# Altium PCB FPGA_Board.PcbDoc (part 4 of 10)
Units mm, origin at the board's own origin, x right, y up, seen from the top; angles counter-clockwise.
Board outline 103.63 x 86.08 mm, 2 copper layers (Top Layer, Bottom Layer); 109 components, 200 nets, 667 pads, 237 vias.
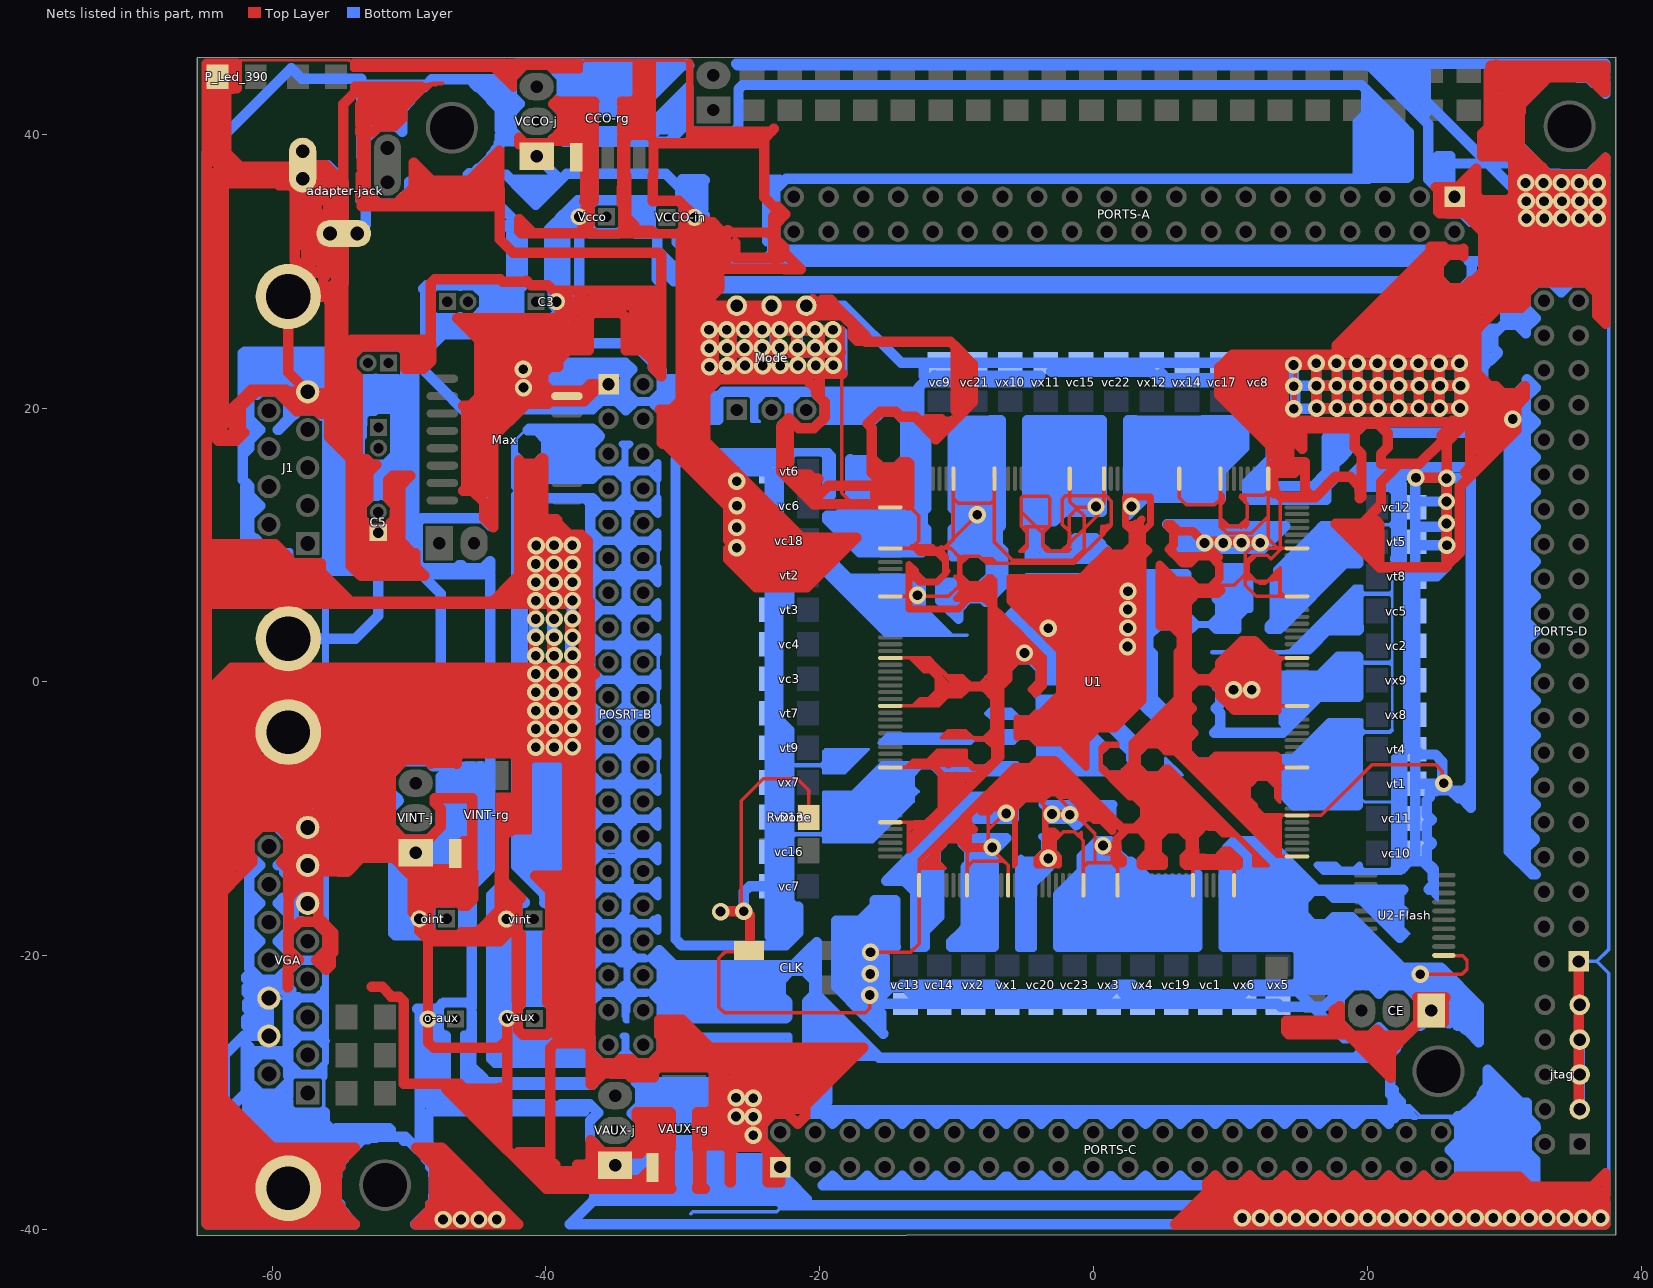
[diagram p4: the nets of this part, all layers, seen from the top]

## Via types
v1: diameter 1.27, hole 0.711, Top Layer to Bottom Layer, 237 vias

## Nets (pads, with @x,y where several pads share a name; then routed paths per layer and width w, separated by ;. In a path a pad name is that pad's centre, name@x,y a point inside that pad or via, vN(x,y) a via of type N, cw(c..) or ccw(c..) an arc to the next point about the centre after c; other vN are vias at no path point) (continued)
GND: (continued)
  Top Layer w0.762: P_Led_390.2@-64.771,45.051 -64.771,9.89 ; -64.771,45.139 -63.061,45.139 ; -62.584,45.079 -62.584,43.35 -62.862,43.35 -62.883,43.329 -62.967,43.413 -62.967,45.055 -62.883,45.139 ; -62.584,45.139 -62.883,45.139 ; VGA.16@-59.052,-36.985 VGA.16@-58.822,-36.985 -60.556,-38.72 ; J1.10@-58.822,3.155 J1.10@-58.822,1.03 ; adapter-jack.2A@-57.775,36.75 -58.463,37.438 -59.794,37.438 ; adapter-jack.2@-57.775,37.75 -56.079,37.75 -54.817,36.488 ; VGA.6@-57.402,-16.17 VGA.7@-57.402,-13.4 ; -55.226,-38.192 -55.257,-38.223 ; -55.226,-35.428 -55.226,-35.279 ; -55.022,-38.279 -55.022,-38.458 ; -55.022,-35.447 -55.293,-35.718 ; -54.755,-38.725 -55.022,-38.458 ; -54.727,19.712 -54.727,18.203 -54.712,18.218 -54.712,19.698 -54.726,19.713 ; -54.324,-34.366 -55.226,-35.268 ; -53.159,36.334 -53.159,35.844 -52.231,34.916 ; -52.72,-22.279 -51.972,-22.279 -51.303,-22.948 -51.303,-22.991 -50.721,-22.991 -50.379,-23.333 -50.379,-29.339 -46.343,-29.339 -45.959,-29.723 ; -52.656,40.159 -52.231,40.584 -51.071,40.584 -50.494,41.161 ; C5.1@-52.25,10.9 C5.1@-52.46,10.9 ; -51.101,41.076 -52.848,41.076 ; -51.041,12.445 -51.041,11.899 ; -50.898,-11.034 -50.418,-11.514 -48.606,-11.514 -47.678,-10.586 -47.678,-9.274 -48.116,-8.836 -48.116,-8.484 -45.376,-8.484 -45.376,-11.635 ; -49.179,43.247 -50.494,41.932 -50.494,41.161 ; -49.09,43.489 -53.941,43.489 -53.941,43.058 -54.817,42.182 -54.817,36.488 ; -48.426,-5.985 -48.34,-5.899 -46.608,-5.899 ; -46.516,-5.991 -46.608,-5.899 ; -46.374,-5.405 -46.516,-5.548 -46.516,-5.899 ; v1(-46.204,-39.267) v1(-47.514,-39.267) -49.157,-39.267 -49.504,-39.614 -42.011,-39.614 -47.592,-34.032 -49.477,-34.032 -48.174,-35.335 -48.174,-37.913 ; v1(-44.893,-39.267) v1(-43.597,-39.267) ; -44.245,-39.238 -49.128,-39.238 -48.552,-38.662 ; -43.386,35.971 -43.386,34.753 ; vaux.2@-42.833,-24.575 -42.833,-26.125 ; -42.539,-9.696 -42.704,-9.861 ; -42.402,-10.753 -42.405,-10.756 ; -41.963,12.193 -41.963,16.193 -41.7,15.931 -40.69,15.931 -40.27,16.351 -40.205,16.286 -40.205,11.942 -40.142,11.879 ; -41.853,-23.519 -41.853,-23.398 ; -41.853,-15.812 -43.066,-14.599 ; -41.225,12.335 -41.424,12.534 -41.424,15.412 -40.783,15.412 -40.712,15.341 -40.783,15.27 -40.783,11.879 ; v1@-40.898,4.508 -40.844,4.562 v1@-40.844,5.692 ; v1@-40.889,3.202 -40.889,1.869 v1@-40.853,1.833 ; v1@-40.862,7.164 -40.859,7.167 v1@-40.859,7.512 ; v1@-40.859,8.609 v1@-40.859,7.512 ; v1@-40.844,5.841 v1@-40.844,5.692 ; v1@-40.827,-4.777 v1@-40.827,-4.305 ; v1@-40.8,-3.427 -40.827,-3.454 v1@-40.827,-3.659 ; v1(-40.712,9.956) v1@-40.252,9.956 ; -40.026,-5.507 -41.042,-5.507 -41.124,-5.589 -41.408,-5.873 -41.612,-5.873 ; -39.941,-5.507 -39.09,-5.507 ; -39.76,25.374 -44.205,25.374 -44.367,25.212 -45.275,26.12 -45.225,26.07 -39.235,26.07 -38.765,26.07 ; v1@-39.544,3.221 -39.528,3.205 v1@-39.528,1.874 ; v1@-39.544,4.552 v1@-39.544,5.692 ; v1@-39.512,7.167 v1@-39.512,7.464 ; v1@-39.496,5.836 -39.544,5.788 v1@-39.544,5.692 ; v1@-39.417,-3.433 -39.407,-3.423 v1@-39.407,-3.042 ; v1(-39.408,9.976) -39.428,9.956 v1@-40.236,9.956 ; v1@-38.223,3.195 -38.215,3.203 v1@-38.215,4.537 ; v1@-38.199,1.878 v1@-38.199,1.03 ; v1@-38.199,8.603 -38.205,8.609 v1@-38.483,8.609 ; v1@-38.174,0.544 -38.199,0.569 v1@-38.199,1.03 ; v1@-38.158,-0.773 v1@-38.158,-1.105 ; v1@-38.15,7.163 v1@-38.15,6.946 ; v1@-38.134,5.846 -38.15,5.862 v1@-38.15,6.273 ; v1@-38.109,-2.082 -38.158,-2.033 v1@-38.158,-1.105 ; v1@-38.081,-3.409 v1@-38.081,-3.426 ; v1(-38.063,-4.724) -38.081,-4.706 v1@-38.081,-4.282 ; -37.732,-35.278 -37.071,-35.278 -36.584,-34.791 ; Vcco.2@-37.575,33.975 -37.575,34.051 -36.86,34.767 ; -36.729,-29.383 -36.729,-27.816 ; -36.455,32.779 -37.135,32.779 ; -36.441,0.556 -36.763,0.877 ; -36.382,21.75 -36.766,21.75 -37.255,21.261 -39.687,21.261 ; -29.192,24.065 -29.16,24.033 -29.16,22.575 ; v1@-28.041,23.029 v1@-28.431,23.029 ; v1@-27.924,25.697 -27.902,25.675 v1@-27.737,25.675 ; v1(-27.245,-16.776) -27.164,-16.857 -27.056,-16.749 v1(-25.546,-16.749) ; v1@-26.811,24.394 -27.595,24.394 v1@-27.737,24.252 ; v1@-26.784,23.09 -27.203,23.09 v1@-27.737,22.556 ; -26.171,32.083 -26.171,30.975 -23.412,30.975 ; v1@-26.167,-30.38 v1@-26.167,-30.479 ; v1(-26.113,-31.743) -26.167,-31.689 v1@-26.167,-31.433 ; -26.086,22.1 -26.475,22.489 -26.475,22.5 ; v1(-26.075,14.65) -26.075,12.9 v1(-26.05,12.875) -26.05,11.3 v1(-26.075,11.275) v1(-26.075,9.8) -26.601,10.326 -26.701,10.326 -26.701,12.787 -31.295,17.381 -31.456,17.381 -31.555,17.48 -31.555,19.763 -31.681,19.889 -30.857,19.889 -30.166,20.58 -30.166,32.154 -30.096,32.224 -30.04,32.168 -29.596,32.168 -29.596,20.817 -29.818,20.595 -29.818,20.512 -30.984,19.346 -30.984,17.875 -31.067,17.792 -26.682,13.407 -26.627,13.407 -26.627,15.017 -26.932,15.322 -27.098,15.156 -27.098,14.489 -28.32,15.711 -28.32,16.405 -27.57,15.655 -27.293,15.655 -28.597,16.959 -28.653,16.959 -28.902,16.71 -28.902,16.21 -30.429,17.737 -30.429,18.736 -30.651,18.958 -29.152,20.457 -29.152,20.512 -28.986,20.512 -28.958,20.484 -29.097,20.345 -29.097,18.319 ; v1@-25.501,24.394 -26.168,24.394 v1@-26.475,24.088 ; v1@-25.487,23.09 -25.885,23.09 -26.475,22.5 ; CLK.2@-25.175,-19.625 -25.1,-19.55 v1@-25.1,-17.055 ; v1(-24.858,-30.412) v1@-24.925,-30.479 ; v1(-24.858,-33.109) v1@-25.023,-33.109 ; v1@-24.816,-31.82 -24.89,-31.82 -24.934,-31.776 v1@-24.934,-31.337 ; -24.567,-31.163 -23.812,-31.163 ; v1@-24.197,23.097 -24.258,23.097 -24.855,22.5 ; -23.798,-34.624 -23.798,-35.407 ; -23.235,30.798 -23.412,30.975 ; v1@-22.893,23.09 -22.893,22.842 -23.235,22.5 ; PORTS-C.1@-22.882,-35.229 -23.798,-34.313 ; PORTS-C.1@-22.882,-35.07 -22.882,-34.782 -23.798,-33.866 ; v1@-21.603,23.097 -21.603,22.512 v1@-21.615,22.5 ; -20.985,26.395 -20.985,25.685 -20.975,25.675 ; Mode.4@-20.529,27.94 -20.529,27.886 -20.01,27.367 -19.979,27.398 -19.308,27.398 -19.827,27.917 -19.198,27.917 -19.085,27.804 -19.085,27.708 -17.051,25.674 ; v1@-20.286,23.123 -20.286,22.791 -19.995,22.5 ; v1(-19.052,24.422) -19.052,24.291 -18.946,24.185 -18.548,24.185 v1@-18.525,24.162 ; -18.525,22.65 v1@-18.525,24.088 ; -18.375,22.5 -19.995,22.5 ; -16.194,16.626 -16.194,18.545 -16.496,18.847 -15.599,19.744 -14.47,19.744 -14.077,19.351 -13.045,19.351 -11.536,17.842 -11.536,17.722 -11.136,18.121 ; -10.599,-5.955 -10.847,-5.707 -10.974,-5.58 -11.628,-5.58 -11.554,-5.506 -10.244,-5.506 -9.9,-5.506 -9.563,-5.506 ; -9.697,23.267 -9.368,22.938 -9.368,20.505 -10.071,19.802 -10.071,24.471 ; -4.642,-2.819 -4.884,-3.061 ; -3.746,-2.276 -4.53,-3.061 -4.884,-3.061 ; -2.364,-0.895 -2.364,-0.816 -1.812,-0.264 -1.812,0.749 ; -2.003,3.209 -2.003,2.694 -2.003,2.294 ; -1.882,2.815 -1.467,2.815 3.464,7.746 3.464,6.909 v1@3.103,6.548 ; v1(2.489,5.289) v1@2.489,5.05 ; v1(2.504,3.934) 2.489,3.949 v1@2.489,5.05 ; v1(2.51,6.629) v1@2.847,6.292 ; 8.158,-38.729 8.178,-38.709 ; 10.209,-39.193 v1@11.112,-39.193 ; 10.651,-7.741 10.119,-7.741 10.119,-7.91 11.025,-8.816 11.025,-8.499 ; v1(10.86,-39.158) v1@11.147,-39.158 ; v1@11.205,-39.1 v1@11.147,-39.158 ; 11.529,-39.193 v1@11.112,-39.193 ; 11.614,-9.088 11.35,-8.824 11.106,-8.58 ; 11.75,-10.218 8.923,-7.391 10.892,-7.391 11.025,-7.524 ; 12.83,-39.193 v1@12.865,-39.158 ; 13.183,13.764 13.183,14.154 13.131,14.206 13.131,15.863 13.533,15.461 13.533,15.268 14.66,15.268 15.436,16.044 ; 13.2,-10.955 12.958,-10.713 12.958,-10.556 12.363,-9.961 ; 13.206,-7.185 13.137,-7.115 12.916,-6.895 12.877,-6.856 11.821,-6.856 11.782,-6.895 11.567,-7.11 11.35,-7.327 11.153,-7.524 ; 13.313,-9.961 12.979,-9.961 12.363,-9.961 ; 13.625,13.584 13.725,13.484 15.957,13.484 15.967,13.494 ; 14.113,-39.15 12.873,-39.15 v1@12.865,-39.158 ; 14.262,-25.732 14.156,-25.625 ; 14.403,-25.732 17.829,-25.732 ; v1(14.6,23.15) v1@16.25,23.15 ; v1@15.044,-38.602 15.044,-37.768 14.818,-37.542 ; v1@15.408,-39.156 16.605,-39.156 v1@16.607,-39.158 ; v1(16.25,23.275) v1@16.25,23.15 ; v1(16.275,21.638) v1@17.746,21.638 ; v1@16.685,-39.236 v1@16.607,-39.158 ; 17.534,-23.986 17.534,-24.147 ; v1@17.955,-39.359 18.21,-39.359 v1@18.411,-39.158 ; v1@19.146,-39.022 18.547,-39.022 v1@18.411,-39.158 ; v1(19.243,23.275) v1@19.243,23.15 ; 19.51,18.609 19.77,18.869 20.78,18.869 21.494,18.155 21.494,17.145 20.986,16.637 20.986,15.924 22.318,15.924 ; 20.226,-25.834 18.914,-25.834 17.986,-24.906 ; v1@20.548,-39.03 20.579,-38.999 21.876,-38.999 v1@22.035,-39.158 ; v1(20.739,23.275) v1@20.739,23.15 ; v1(22.236,23.275) v1@22.236,23.15 ; v1@23.226,-38.969 v1@24.548,-38.969 ; v1(23.539,14.903) 25.738,14.903 v1(25.776,14.865) ; v1(23.732,23.275) v1@23.732,23.15 ; CE.1@24.65,-24 24.64,-24 CE.1@23.781,-24.858 ; v1(25.229,23.275) v1@25.229,23.15 ; v1@25.329,-39.349 22.226,-39.349 v1@22.035,-39.158 ; 25.517,35.496 25.571,35.442 25.571,34.673 25.612,34.714 27.424,34.714 ; 25.678,8.383 21.113,8.383 20.867,8.63 ; 25.871,-38.943 25.897,-38.917 27.22,-38.917 ; v1(26.8,21.638) v1@26.725,21.638 ; 28.2,34.259 27.968,34.027 27.968,34.519 27.89,34.597 27.541,34.597 27.424,34.714 ; 28.397,35.013 28.382,34.998 ; 28.54,-38.895 28.596,-38.839 30.496,-38.839 34.424,-38.839 36.175,-38.839 36.418,-38.596 ; v1(30.609,19.197) 30.777,19.029 v1@30.864,19.029 ; 31.103,41.553 31.121,41.571 ; 31.103,42.704 30.667,43.14 30.667,43.558 30.894,43.331 31.748,43.331 31.748,43.505 32.794,44.551 ; v1(31.55,36.446) 31.55,36.409 31.579,36.38 v1@31.677,36.38 ; v1@31.596,35.095 v1@31.677,35.095 ; v1(31.615,33.855) v1@32.119,33.855 ; 31.877,-37.059 31.727,-37.209 31.27,-37.209 ; 32.764,37.585 32.702,37.646 32.606,37.646 ; v1@32.889,36.38 v1@31.825,36.38 ; v1@32.919,33.855 v1(32.909,33.855) v1@32.748,33.855 ; v1@32.919,35.091 32.915,35.095 v1@32.728,35.095 ; v1@34.183,36.405 34.21,36.432 v1@35.425,36.432 ; v1@34.216,35.095 v1@34.832,35.095 ; v1@34.232,33.855 34.271,33.816 v1@34.706,33.816 ; v1@34.565,-39.323 36.191,-39.323 v1@36.356,-39.158 ; 35.433,-24.4 35.433,-31.143 jtag.3@35.5,-31.21 ; jtag.9@35.433,-23.59 PORTS-D.1@35.433,-20.415 ; v1@35.506,35.099 35.502,35.095 v1@35.223,35.095 ; v1@35.6,33.816 v1@35.223,33.816 ; v1@35.849,-39.359 v1@36.841,-39.359 ; v1@36.784,36.432 v1@36.734,36.432 ; v1@36.789,33.798 36.809,33.818 v1(36.809,35.112) ; v1@37.089,-39.223 v1@37.042,-39.176 ; 37.234,29.31 37.218,29.294 ; 37.387,37.182 37.387,26.169 36.767,26.789 36.767,28.398 36.11,29.055 36.11,29.091 36.074,29.091 35.986,29.179 32.34,29.179 31.559,28.398 31.559,27.643 31.227,27.311 29.555,27.311 28.396,26.152 ; 37.387,37.318 37.387,38.279 36.154,37.047 33.206,37.047 32.606,37.646 ; -64.771,-0.783 -64.771,-39.572 -64.729,-39.614 -63.979,-39.614 ; -64.771,-0.783 -62.958,1.03 J1.10@-58.822,1.03 ; -64.771,-0.783 -64.771,5.692 ; -64.771,5.692 -54.317,5.692 ; -64.771,5.692 -64.771,6.155 ; -64.771,6.155 -62.374,6.155 -62.203,6.326 -55.511,6.326 -56.08,6.895 -56.08,6.99 -56.743,7.653 ; -64.771,6.155 -64.771,9.89 ; -64.771,9.89 -64.611,9.89 -64.435,10.066 -59.783,10.066 -58.831,9.114 -58.831,9.023 -58.489,8.681 -56.46,8.681 -56.46,8.039 -54.563,6.142 ; -64.276,-30.914 -61.753,-33.437 -61.554,-33.238 ; -64.276,-30.914 -64.276,-39.317 -63.979,-39.614 ; -64.276,-30.914 -64.276,-16.567 ; -64.276,-16.567 -63.755,-16.046 -63.755,-9.581 -63.484,-9.31 -64.172,-9.31 -64.276,-9.206 -64.276,-16.567 ; P_Led_390.2@-64,44.2 -63.061,45.139 ; P_Led_390.2@-64,44.2 -64,39.475 -64,39.284 -63.362,38.646 ; P_Led_390.2@-64,44.2 -63.362,43.562 -63.362,38.837 -63.362,38.646 ; -63.979,-39.614 -60.76,-39.614 ; -63.615,-15.373 -63.615,-30.384 -59.967,-34.032 -58.989,-34.032 ; -63.615,-15.373 -63.615,-15.343 -63.066,-14.794 ; -63.615,-15.373 -63.066,-14.823 -63.066,-14.794 ; -63.412,38.003 -62.809,37.399 -62.758,37.399 -62.517,37.158 -62.517,37.055 ; -63.412,38.003 -63.792,37.623 -64.361,38.192 -64.361,38.933 -63.948,38.52 -63.93,38.52 -63.412,38.003 ; -63.412,38.003 -63.362,38.053 -63.362,38.646 ; -63.362,38.646 -62.154,37.438 -59.794,37.438 ; -63.066,-14.794 -61.44,-13.168 -61.44,-12.838 -61.671,-12.607 -61.671,-11.423 ; -63.066,-14.794 -63.066,-8.843 ; -63.066,-8.843 -64.387,-8.843 -64.387,-1.288 -62.909,0.19 -62.472,0.19 -62.472,0.224 -62.64,0.392 -58.822,0.392 ; -63.066,-8.843 -63.066,-8.508 ; -63.066,-8.843 -58.032,-8.843 ; -63.066,-8.508 -63.066,-7.976 ; -63.066,-8.508 -63.513,-8.508 -63.883,-8.138 -63.883,-1.59 -62.545,-0.252 -62.545,-0.239 -58.822,-0.239 ; -63.066,-8.508 -58.367,-8.508 ; -63.066,-7.976 -63.066,-6.766 -62.691,-7.141 ; -63.066,-7.976 -63.086,-7.976 -63.296,-7.766 -63.296,-2.012 -62.128,-0.844 -58.822,-0.844 ; -63.066,-7.976 -58.899,-7.976 ; -63.061,45.139 -62.883,45.139 ; -62.691,-7.141 -62.649,-7.183 -59.125,-7.183 ; -62.691,-7.141 -62.691,-7.517 -62.566,-7.392 -59.125,-7.392 ; -62.691,-7.141 -62.691,-2.324 -61.899,-1.532 VGA.17@-58.822,-1.532 ; -62.517,37.055 -60.177,37.055 ; -62.517,37.055 -63.327,37.055 -63.447,37.175 -64.206,37.175 -64.103,37.072 -64.103,20.7 -64.189,20.614 -64.189,18.667 -63.602,18.667 -62.793,19.476 -62.793,19.58 -62.758,19.545 -62.758,18.288 -62.982,18.064 -64.378,18.064 -63.93,17.616 -62.62,17.616 -62.052,18.184 -62.276,18.408 -62.276,20.08 -61.122,21.234 -59.65,21.234 -58.813,20.397 -58.813,20.373 -58.192,19.752 -58.091,19.752 -57.994,19.849 -56.81,19.849 -56.558,19.597 -55.848,19.597 ; -62.441,-34.125 -62.191,-34.375 -62.086,-34.375 -62.086,-37.545 -62.419,-37.878 -62.712,-37.878 -62.712,-34.459 -63.046,-34.125 -62.441,-34.125 ; -62.441,-34.125 -63.275,-33.291 -63.275,-38.504 -61.752,-38.504 -61.669,-38.421 -61.836,-38.254 -61.836,-35.043 -61.252,-34.459 -61.252,-34.438 -61.565,-34.125 ; -62.441,-34.125 -61.565,-34.125 ; -61.94,-12.687 -62.671,-13.418 -62.795,-13.418 -62.441,-13.064 -62.441,-9.227 -61.503,-9.227 -61.44,-9.164 -61.44,-9.56 ; -61.94,-12.687 -61.836,-12.583 -61.836,-13.126 -61.94,-13.23 -61.94,-12.687 ; -61.94,-12.687 -61.94,-9.56 -61.44,-9.56 ; -61.671,-11.423 -61.671,-11.192 -61.44,-10.961 -61.44,-9.56 ; -61.671,-11.423 -60.834,-10.586 -59.518,-10.586 ; -61.565,-34.125 -63.504,-32.186 -63.713,-32.186 -63.755,-32.228 -63.755,-39.025 -63.713,-39.067 -61.336,-39.067 -60.939,-38.67 -60.939,-38.567 -61.398,-38.108 -61.398,-35.376 ; -61.565,-34.125 -60.668,-34.125 ; -61.554,-33.238 -63.817,-30.976 -63.588,-30.976 -61.336,-33.228 -61.544,-33.228 -61.554,-33.238 ; -61.554,-33.238 -60.668,-34.125 ; -61.44,-9.56 -58.104,-9.56 -57.895,-9.769 VGA.8@-57.895,-10.137 ; -61.398,-35.376 -61.398,-35.272 -61.315,-35.272 -60.564,-34.521 ; -61.398,-35.376 -61.544,-35.376 -60.689,-34.521 -60.564,-34.521 ; -61.398,-35.376 -60.606,-35.376 ; -60.76,-39.614 -56.648,-39.614 ; -60.76,-39.614 -60.76,-38.923 -60.556,-38.72 ; -60.668,-34.125 -60.418,-34.375 -60.564,-34.521 ; -60.668,-34.125 -59.271,-34.125 -58.875,-34.521 -60.564,-34.521 ; -60.606,-35.376 -60.189,-34.959 -60.085,-34.959 -60.502,-35.376 -60.606,-35.376 ; -60.606,-35.376 -61.127,-35.897 -61.127,-38.149 -60.556,-38.72 ; -60.556,-38.72 -60.105,-39.171 -56.581,-39.171 -56.394,-38.984 -56.499,-38.879 -56.79,-38.879 -56.79,-38.733 -55.831,-37.774 -55.768,-37.774 -55.768,-34.521 -56.122,-34.167 -58.291,-34.167 -56.706,-35.752 ; -60.177,37.055 -59.467,37.055 -59.157,36.745 -56.795,36.745 -56.399,37.141 -55.314,36.056 -55.314,29.23 -55.761,28.783 -56.279,28.783 -56.279,29.489 -55.9,29.868 -55.9,34.918 -56.261,35.279 -56.261,35.71 ; -60.177,37.055 -59.794,37.438 ; -59.834,8.184 -60.573,8.184 -60.801,7.956 -63.398,7.956 -63.266,7.824 -62.09,7.824 -61.938,7.672 -59.55,7.672 -59.834,7.956 -59.834,8.184 ; -59.834,8.184 -59.569,8.184 -58.962,7.577 -57.54,7.577 ; -59.834,8.184 -59.834,8.298 -60.289,8.753 -60.422,8.62 -63.834,8.62 -63.834,7.597 -63.549,7.312 -57.711,7.312 -57.54,7.483 -57.54,7.577 ; -59.518,-10.586 -58.813,-11.291 ; -59.518,-10.586 -59.584,-10.52 -60.835,-10.52 -60.919,-10.436 -60.919,-9.957 -58.916,-9.957 -58.77,-10.103 ; -59.518,-10.586 -59.171,-10.586 ; -59.171,-10.586 -58.333,-10.586 ; -59.171,-10.586 -58.813,-10.944 -58.813,-11.291 ; -59.171,-10.586 -59.292,-10.465 -59.292,-10.103 -58.77,-10.103 ; -59.125,-7.392 -54.747,-7.392 -51.16,-3.805 ; -59.125,-7.392 -59.125,-7.75 -58.899,-7.976 ; -59.125,-7.392 -59.125,-7.183 ; -59.125,-7.183 -59.125,-6.933 ; -59.125,-7.183 -56.289,-7.183 -55.465,-6.359 ; -59.125,-6.933 -56.102,-6.933 -55.497,-6.328 ; -59.125,-6.933 -59.125,-6.266 ; -59.125,-6.933 -61.753,-6.933 -62.149,-6.537 -62.066,-6.454 -62.066,-2.533 -61.774,-2.241 VGA.17@-58.822,-2.241 ; -59.125,-6.266 -56.415,-6.266 -55.987,-5.838 ; -59.125,-6.266 VGA.17@-59.125,-5.598 ; -59.125,-6.266 -61.524,-6.266 -61.503,-6.245 -61.503,-2.929 VGA.17@-58.822,-2.929 ; VGA.17@-59.125,-5.598 -56.498,-5.598 -56.362,-5.462 ; VGA.17@-59.125,-5.598 VGA.17@-59.125,-4.785 ; VGA.17@-59.125,-5.598 -61.106,-5.598 -61.148,-5.556 -61.148,-4.785 VGA.17@-59.125,-4.785 ; VGA.17@-59.125,-4.785 VGA.17@-56.811,-4.785 ; VGA.17@-59.125,-4.785 -59.125,-3.968 VGA.17@-58.822,-3.665 VGA.17@-58.822,-2.929 ; -58.989,-34.032 -56.977,-36.044 -56.977,-38.775 -56.706,-38.504 -56.706,-35.752 ; -58.989,-34.032 -55.226,-34.032 ; -58.899,-7.976 -54.454,-7.976 -50.783,-4.305 v1@-40.827,-4.305 ; -58.899,-7.976 -58.367,-8.508 ; -58.854,21.19 -58.071,20.407 -56.365,20.407 ; -58.854,21.19 -59.019,21.355 -61.517,21.355 -63.447,19.425 -63.689,19.425 -63.534,19.58 -63.534,36.624 -63.344,36.434 -59.639,36.434 -59.484,36.279 -58.674,36.279 -58.261,35.866 -58.364,35.763 -58.364,30.747 -58.192,30.575 -57.761,30.575 -57.519,30.817 -57.519,31.626 -57.623,31.73 -57.623,35.384 -57.881,35.642 -57.416,35.642 -56.899,35.125 -56.899,33.78 -56.916,33.763 -56.916,30.747 -57.261,30.402 -57.261,30.024 -57.105,29.868 -56.727,29.868 -56.33,30.265 -56.33,33.987 -56.744,34.401 -56.744,36.193 -56.261,35.71 ; -58.854,21.19 J1.5@-57.402,21.19 ; -58.831,-19.532 -58.831,-18.348 -58.792,-18.309 ; -58.831,-19.532 -58.057,-20.307 -58.813,-21.063 ; -58.831,-19.532 -58.831,-19.571 -58.813,-19.59 -58.813,-21.063 ; VGA.17@-58.822,-2.929 -54.454,-2.929 ; VGA.17@-58.822,-2.929 VGA.17@-58.822,-2.241 ; VGA.17@-58.822,-2.241 -52.682,-2.241 -52.64,-2.199 v1@-40.253,-2.199 ; VGA.17@-58.822,-2.241 VGA.17@-58.822,-1.532 ; VGA.17@-58.822,-1.532 -39.744,-1.532 ; VGA.17@-58.822,-1.532 -58.822,-0.844 ; -58.822,-0.844 v1@-39.744,-0.844 ; -58.822,-0.844 -58.822,-0.239 ; -58.822,-0.239 v1@-39.744,-0.239 ; -58.822,-0.239 -58.822,0.392 ; -58.822,0.392 v1@-39.649,0.392 ; -58.822,0.392 J1.10@-58.822,1.03 ; J1.10@-58.822,1.03 v1@-38.199,1.03 ; -58.813,-21.063 -58.869,-21.119 -58.869,-22.315 -58.831,-22.277 -58.831,-21.118 -58.813,-21.1 -58.813,-21.063 ; -58.813,-12.607 -58.813,-11.291 ; -58.813,-12.607 -58.813,-13.522 -58.792,-13.543 ; -58.813,-12.607 -59.323,-13.117 -59.323,-13.173 -58.813,-13.683 -58.813,-15.586 -58.792,-15.607 ; -58.792,-18.309 -57.994,-17.511 -56.81,-17.511 -55.973,-18.348 -55.973,-19.532 -56.766,-20.325 -56.06,-21.03 -55.722,-20.692 -55.722,-20.036 -56.021,-20.335 -56.121,-20.335 -55.522,-19.736 -55.522,-18.327 -56.648,-17.201 -56.648,-14.112 -56.363,-13.827 -55.166,-13.827 -55.138,-13.855 -54.497,-13.855 -53.486,-12.844 -51.135,-12.844 -50.01,-13.969 -49.768,-13.727 -49.768,-13.627 -49.726,-13.669 -49.726,-16.831 oint.2@-49.257,-17.3 ; -58.792,-18.309 -58.792,-15.607 ; -58.792,-15.607 -58.687,-15.712 -58.687,-15.628 -57.895,-14.836 VGA.8@-57.895,-10.586 ; -58.792,-15.607 -58.792,-14.377 ; -58.792,-14.377 -58.312,-14.857 -58.312,-14.023 -58.792,-13.543 ; -58.792,-14.377 -58.792,-13.543 ; -58.792,-13.543 -58.792,-13.168 -58.604,-13.356 -58.312,-13.356 -58.333,-13.335 -58.333,-10.586 ; -58.77,-10.103 -58.333,-10.54 -58.333,-10.586 ; -58.77,-10.103 -57.929,-10.103 VGA.8@-57.895,-10.137 ; -58.367,-8.508 -54.077,-8.508 -50.382,-4.813 -41.612,-4.813 ; -58.367,-8.508 -58.032,-8.843 ; -58.333,-10.586 VGA.8@-57.895,-10.586 ; -58.032,-8.843 -53.455,-8.843 -52.01,-7.397 ; -58.032,-8.843 -57.402,-9.473 VGA.8@-57.402,-10.63 ; VGA.8@-57.895,-10.586 VGA.8@-57.446,-10.586 ; VGA.8@-57.895,-10.586 VGA.8@-57.895,-10.137 ; VGA.8@-57.895,-10.137 VGA.8@-57.446,-10.586 ; -57.54,7.577 -57.54,7.653 -57.464,7.653 ; -57.54,7.577 -57.464,7.653 ; -57.464,7.653 -57.426,7.653 ; VGA.8@-57.446,-10.586 VGA.8@-57.402,-10.63 ; -57.426,7.653 -56.592,6.819 -56.933,6.819 -57.066,6.686 -64.099,6.686 -64.156,6.743 -64.156,7.027 -64.251,7.122 -64.251,9.188 -64.308,9.245 -64.156,9.397 -60.137,9.397 -60.023,9.283 -59.89,9.283 -59.246,8.639 -59.474,8.411 -59.72,8.411 -59.436,8.127 -56.952,8.127 -56.952,7.862 -56.743,7.653 ; -57.426,7.653 -56.743,7.653 ; VGA.7@-57.402,-13.4 VGA.8@-57.402,-10.63 ; VGA.7@-57.402,-13.4 -54.825,-13.4 -53.75,-12.325 -51.435,-12.325 ; J1.5@-57.402,21.19 -58.822,22.61 J1.11@-58.822,28.145 -55.688,28.145 -54.817,29.016 ; J1.5@-57.402,21.19 -57.309,21.097 -56.003,21.097 ; VGA.17@-56.811,-4.785 -56.582,-4.785 -55.289,-3.492 -56.289,-3.492 -56.811,-4.014 VGA.17@-56.811,-4.785 ; VGA.17@-56.811,-4.785 -56.811,-5.014 -56.362,-5.462 ; -56.743,7.653 -56.278,7.653 -54.767,6.142 ; -56.706,-35.752 -56.706,-35.104 -56.686,-35.084 -56.686,-35.042 -57.207,-34.521 -56.873,-34.521 -56.769,-34.417 -56.164,-35.022 -56.164,-37.377 -56.331,-37.544 -56.331,-35.918 -56.414,-35.835 -56.623,-35.835 -56.706,-35.752 ; -56.648,-39.614 -55.704,-38.67 ; -56.648,-39.614 -55.869,-39.614 ; -56.365,20.407 -56.003,20.407 -55.934,20.338 -55.969,20.338 -56.365,19.942 -56.365,20.407 ; -56.365,20.407 -56.365,20.735 -56.003,21.097 ; -56.362,-5.462 -55.987,-5.838 ; -56.362,-5.462 -54.58,-3.68 ; -56.261,35.71 -55.882,35.331 -55.813,35.4 -55.813,35.762 -56.261,36.21 -56.261,35.71 ; -56.003,21.097 -55.813,21.097 ; -56.003,21.097 -55.813,21.287 ; -55.987,-5.838 -53.829,-3.68 ; -55.987,-5.838 -55.497,-6.328 ; -55.869,-39.614 -54.759,-39.614 ; -55.869,-39.614 -55.314,-39.059 ; -55.848,19.597 -54.817,20.628 -54.817,29.016 ; -55.848,19.597 -55.848,17.9 -54.542,16.593 ; -55.813,21.097 -55.572,21.097 -55.365,21.304 ; -55.813,21.097 -55.813,20.666 -55.365,20.666 -55.365,21.304 ; -55.813,21.097 -55.813,21.287 ; -55.813,21.287 -55.538,21.562 -55.365,21.389 -55.365,21.304 ; -55.813,21.287 -55.813,27.697 -55.848,27.732 -55.762,27.818 -55.227,27.818 -55.227,21.442 -55.365,21.304 ; -55.704,-38.67 -55.293,-38.259 ; -55.704,-38.67 -55.314,-39.059 ; -55.594,-11.52 -55.679,-11.605 -55.394,-11.89 -55.294,-11.89 -55.594,-11.59 -55.594,-11.52 ; -55.594,-11.52 -55.508,-11.434 -53.814,-11.434 -53.557,-11.177 ; -55.594,-11.52 -55.594,-10.522 -53.756,-10.522 -53.543,-10.309 -53.543,-10.38 -54.098,-10.935 -55.038,-10.935 -54.796,-11.177 -53.557,-11.177 ; -55.497,-6.328 -52.849,-3.68 ; -55.497,-6.328 -55.465,-6.359 ; -55.465,-6.359 -55.247,-6.578 -55.247,-6.912 -52.14,-3.805 ; -55.465,-6.359 -52.911,-3.805 -52.14,-3.805 ; -55.314,-39.059 -55.293,-39.038 -55.293,-38.284 ; -55.314,-39.059 -54.759,-39.614 ; -55.293,-38.284 -55.293,-38.259 ; -55.293,-38.284 -55.022,-38.555 ; -55.293,-38.259 -55.293,-38.187 ; -55.293,-38.259 -55.257,-38.223 ; -55.293,-38.187 -55.257,-38.223 ; -55.293,-38.187 -55.293,-35.718 ; -55.293,-35.718 -55.293,-35.347 ; -55.293,-35.347 -55.293,-35.335 -55.226,-35.268 ; -55.293,-35.347 -55.226,-35.279 ; -55.257,-38.223 -55.022,-38.458 ; -55.226,-35.279 -55.226,-35.268 ; -55.226,-35.279 -53.979,-34.032 -55.226,-34.032 ; -55.226,-35.268 -55.226,-34.032 ; -55.022,-38.555 -53.963,-39.614 -54.759,-39.614 ; -55.022,-38.555 -55.022,-38.458 ; -54.817,29.016 -54.817,36.488 ; -54.817,29.016 -54.77,29.063 -54.77,36.488 -54.817,36.488 ; -54.767,6.142 -54.563,6.142 ; -54.767,6.142 -54.317,5.692 ; -54.726,19.713 -54.841,19.827 -55.254,19.414 -55.254,19.343 -55.197,19.286 -55.197,18.047 -54.285,17.135 ; -54.726,19.713 -54.285,20.154 ; -54.58,-3.68 -53.829,-2.929 -54.454,-2.929 ; -54.58,-3.68 -55.205,-3.68 -54.454,-2.929 ; -54.58,-3.68 -53.829,-3.68 ; -54.563,6.142 -54.289,5.868 ; -54.542,16.593 -54.285,16.85 -54.285,17.135 ; -54.542,16.593 -54.25,16.301 -54.25,8.486 -53.51,7.747 -48.899,7.747 -49.545,8.393 -49.545,9.414 -49.777,9.414 -50.659,10.296 -50.659,14.307 -49.902,15.064 -51.196,15.064 -51.539,14.721 -51.539,13.399 -51.041,12.901 -51.041,13.025 -51.165,13.149 -51.165,14.453 -51.015,14.453 -50.882,14.586 -50.882,9.527 -50.033,8.678 -50.033,8.334 -50.051,8.316 -53.12,8.316 -53.738,8.934 -53.738,16.169 ; -54.454,-2.929 -54.121,-2.596 -52.745,-2.596 ; -54.317,5.692 -54.113,5.692 ; -54.289,5.868 -43.907,5.868 ; -54.289,5.868 -54.113,5.692 ; -54.285,17.135 -54.285,20.154 ; -54.285,20.154 -54.285,20.496 -54.209,20.572 -54.209,22.799 ; -54.209,22.799 -54.209,23.801 ; -54.209,22.799 -53.738,22.328 -53.738,16.169 ; -54.209,23.801 -53.501,24.509 -50.607,24.509 -50.291,24.193 -50.291,22.856 -49.713,22.856 ; -54.209,23.801 -54.209,24.272 -54.171,24.31 -54.171,25.011 -48.688,25.011 -48.412,24.735 ; -54.113,5.692 -43,5.692 ; -53.829,-3.68 -52.849,-3.68 ; -53.829,-3.68 -53.162,-3.013 ; -53.738,16.169 -53.641,16.266 -53.126,16.266 ; -53.559,41.19 -52.734,41.19 -52.848,41.076 ; -53.559,41.19 -53.559,40.692 -53.175,41.076 -52.848,41.076 ; -53.559,41.19 -53.559,42.173 -53.345,42.387 -53.345,42.743 -53.402,42.8 -53.203,42.999 -49.884,42.999 -49.87,42.985 -50.51,42.985 -51.094,42.401 ; -53.559,41.19 -52.953,41.796 ; -53.557,-11.177 -52.973,-10.593 -52.973,-9.782 -53.03,-9.839 -56.05,-9.839 -56.306,-10.095 -56.277,-10.124 -56.277,-11.961 -56.007,-12.231 -55.166,-12.231 -55.038,-12.103 -54.397,-12.103 -53.699,-11.405 -52.645,-11.405 -52.432,-11.192 -52.432,-11.177 ; -53.557,-11.177 -52.432,-11.177 ; -53.516,35.379 -53.516,37.046 -53.159,36.689 -53.159,37.587 ; -53.516,35.379 -53.573,35.322 -53.473,35.222 -53.473,34.738 -43.401,34.738 -43.386,34.753 ; -53.516,35.379 -53.053,34.916 -52.231,34.916 ; -53.459,11.899 -53.054,11.494 ; -53.459,11.899 -53.459,11.529 -53.111,11.181 -53.054,11.238 -53.054,11.494 ; -53.459,11.899 -53.459,12.901 -53.199,13.161 ; -53.199,13.161 -52.961,13.399 -52.961,15.311 -52.406,15.866 -52.726,15.866 -53.126,16.266 ; -53.199,13.161 -53.199,16.193 -53.126,16.266 ; -53.162,-3.013 -52.828,-2.679 ; -53.162,-3.013 -53.412,-3.013 -53.078,-2.679 -52.828,-2.679 ; -53.162,-3.013 -52.286,-3.013 ; -53.159,37.587 -53.159,39.907 ; -53.159,37.587 -53.188,37.558 -53.445,37.558 -53.445,39.966 -53.573,40.094 -53.573,40.321 -53.159,39.907 ; -53.159,39.907 -53.159,40.765 -52.848,41.076 ; -53.054,11.494 C5.1@-52.751,11.191 ; -52.953,41.796 -52.348,42.401 -51.565,42.401 ; -52.953,41.796 -52.875,41.717 -52.79,41.632 -51.209,41.632 -50.711,42.13 ; -52.953,41.796 -53.075,41.917 -53.075,42.216 -52.79,42.501 -51.95,42.501 -51.907,42.458 -51.579,42.458 -51.565,42.472 -51.565,42.401 ; -52.849,-3.68 -52.286,-3.117 -52.182,-3.117 ; -52.849,-3.68 -52.015,-3.68 ; -52.828,-2.679 -52.745,-2.596 ; -52.828,-2.679 -52.62,-2.679 ; C5.1@-52.751,11.191 -51.749,11.191 -51.041,11.899 ; C5.1@-52.751,11.191 C5.1@-52.46,10.9 ; -52.745,-2.596 -52.453,-2.304 v1@-40.358,-2.304 ; -52.745,-2.596 -52.703,-2.596 -52.62,-2.679 ; -52.62,-2.679 v1@-40.733,-2.679 ; -52.62,-2.679 -52.286,-3.013 ; C5.1@-52.46,10.9 -52.288,10.728 -52.288,10.137 ; C5.1@-52.46,10.9 -52.897,10.9 -53.226,10.571 -53.172,10.517 -53.172,9.164 -52.925,8.917 -51.687,8.917 ; -52.432,-11.177 -52.01,-11.177 ; -52.432,-11.177 -52.432,-8.614 -53.201,-9.383 -56.62,-9.383 -56.833,-9.596 -56.833,-11.647 -56.733,-11.747 -56.733,-12.559 -56.462,-12.83 -56.263,-12.83 -56.234,-12.801 -54.967,-12.801 -54.098,-11.932 -52.004,-11.932 -52.01,-11.926 -52.01,-11.177 ; -52.288,10.137 -52.103,10.137 -51.687,9.721 -51.687,8.917 ; -52.288,10.137 -52.288,9.518 -52.518,9.518 -52.642,9.642 -52.571,9.713 -52.571,10.137 -52.288,10.137 ; -52.286,-3.013 -52.182,-3.117 ; -52.286,-3.013 v1@-41.067,-3.013 ; -52.231,34.916 -50.919,34.916 -50.498,35.337 ; -52.182,-3.117 -51.723,-3.576 -51.911,-3.576 -52.015,-3.68 ; -52.182,-3.117 v1@-41.171,-3.117 ; -52.14,-3.805 -52.015,-3.68 ; -52.14,-3.805 -51.16,-3.805 ; -52.015,-3.68 -51.035,-3.68 ; -52.01,-11.177 -52.01,-7.397 ; -52.01,-11.177 -51.677,-11.177 -51.591,-11.263 ; -52.01,-7.397 -51.346,-6.734 ; -51.687,8.917 -50.812,8.917 -51.501,9.606 -51.501,10.854 -51.041,11.314 -51.041,11.899 ; -51.591,-11.263 -51.805,-11.477 -51.377,-11.477 ; -51.591,-11.263 -51.346,-11.018 -51.346,-10.586 ; -51.591,-11.263 -51.377,-11.477 ; -51.565,42.401 -51.094,42.401 ; -51.565,42.401 -51.565,42.372 -51.807,42.13 -50.711,42.13 ; -51.435,-12.325 -49.657,-12.325 VINT-j.1@-49.512,-12.47 -49.257,-12.725 oint.2@-49.257,-17.3 ; -51.435,-12.325 -51.435,-11.862 -51.213,-11.64 ; -51.377,-11.477 -51.05,-11.477 -51.213,-11.64 ; -51.377,-11.477 -51.213,-11.64 ; -51.346,-10.586 -50.922,-11.01 -50.922,-11.932 -51.213,-11.64 ; -51.346,-10.586 -51.346,-6.734 ; -51.346,-6.734 -50.306,-5.693 ; -51.16,-3.805 -51.035,-3.68 ; -51.16,-3.805 -41.859,-3.805 -41.734,-3.68 ; -51.094,42.401 -50.255,42.401 -50.526,42.13 ; -51.094,42.401 -51.294,42.201 -50.64,42.201 -50.711,42.13 ; -51.035,-3.68 -41.734,-3.68 ; -51.035,-3.68 -51.014,-3.659 -41.713,-3.659 ; -50.711,42.13 -50.526,42.13 ; -50.526,42.13 -50.526,41.193 -50.494,41.161 ; -50.498,35.337 -50.447,35.387 -50.404,35.387 -49.885,35.907 ; -50.498,35.337 -46.067,35.337 ; -50.306,-5.693 -49.818,-5.206 -41.612,-5.206 ; -50.306,-5.693 -46.722,-5.693 ; -49.885,35.907 -49.656,36.135 ; -49.885,35.907 -45.497,35.907 ; -49.713,22.856 -49.713,24.276 -49.864,24.427 -49.031,24.427 -49.031,23.631 -49.182,23.48 -48.911,23.209 -48.608,23.209 ; -49.713,22.856 -48.96,22.856 -48.608,23.209 ; -49.656,36.135 -49.656,37.914 -48.36,36.618 -45.591,36.618 -43.411,38.798 -43.411,34.778 -43.386,34.753 ; -49.656,36.135 -49.144,36.647 -49.144,36.804 -48.931,36.804 -48.262,36.135 ; -49.656,36.135 -48.262,36.135 ; oint.2@-49.257,-17.3 -49.257,-18.169 -48.619,-18.807 ; -48.619,-18.807 -48.476,-18.95 -46.831,-18.95 ; -48.619,-18.807 o-aux.2@-48.619,-24.625 -48.619,-26.306 -48.2,-26.725 -43.433,-26.725 -42.833,-26.125 ; -48.608,23.209 -48.36,23.456 ; -48.552,-38.662 -43.885,-38.662 -46.031,-36.516 -46.031,-36.487 -47.86,-34.658 -47.86,-34.456 -48.393,-34.456 -47.702,-35.147 -47.702,-37.913 ; -48.552,-38.662 -48.445,-38.555 ; -48.445,-38.555 -48.445,-38.172 -48.187,-37.913 -48.174,-37.913 ; -48.445,-38.555 -48.174,-38.284 -48.174,-37.913 ; -48.412,24.735 -48.36,24.683 -48.36,23.456 ; -48.412,24.735 -48.412,23.509 -48.36,23.456 ; -48.412,24.735 -48.412,29.103 -48.121,29.394 -43.337,29.394 -43.154,29.211 -41.536,29.211 -41.429,29.318 -41.095,28.984 -39.868,28.984 -39.473,28.589 -37.832,28.589 ; -48.262,36.135 -48.174,36.135 ; -48.262,36.135 -48.218,36.091 -48.174,36.135 ; -48.174,-37.913 -47.702,-37.913 ; -48.174,36.135 -48.146,36.163 -45.241,36.163 ; -48.174,36.135 -45.269,36.135 ; -47.702,-37.913 -47.702,-37.957 -47.458,-38.201 -45.008,-38.201 -47.14,-36.069 -47.14,-35.882 -47.327,-36.069 -47.327,-37.524 -46.348,-37.524 ; -47.702,-37.913 -45.959,-37.913 -46.348,-37.524 ; -46.831,-18.95 -43.375,-18.95 -42.775,-18.35 -42.775,-17.438 vint.2@-42.888,-17.325 -42.867,-17.304 -42.867,-16.239 ; -46.831,-18.95 -46.39,-18.509 ; -46.722,-5.693 -46.516,-5.899 ; -46.722,-5.693 -46.722,-5.785 -46.608,-5.899 ; -46.608,-5.899 -46.516,-5.899 ; -46.39,-18.509 -46.146,-18.265 -44.976,-18.265 ; -46.39,-18.509 -48.124,-18.509 -48.534,-18.099 -48.534,-13.992 -48.741,-13.785 -48.65,-13.694 -45.517,-13.694 -45.366,-13.845 ; -46.385,-14.976 -46.372,-14.989 -46.372,-15.209 -46.618,-15.209 -46.385,-14.976 ; -46.385,-14.976 -46.515,-14.846 -46.683,-14.846 -46.89,-15.053 -47.991,-15.053 -47.991,-15.325 -47.576,-15.74 -45.841,-15.74 -45.841,-14.432 ; -46.385,-14.976 -45.841,-14.432 ; -46.348,-37.524 -46.809,-37.063 -46.809,-37.02 -46.305,-37.524 -46.348,-37.524 ; -46.067,35.337 -45.269,35.337 ; -46.067,35.337 -45.497,35.907 ; -45.959,-29.723 -47.303,-29.723 -42.86,-34.167 -42.833,-34.167 ; -45.959,-29.723 -43.456,-29.723 -43.39,-29.657 -43.39,-32.92 -43.514,-33.044 -46.114,-30.444 -46.114,-30.329 -45.353,-30.329 ; -45.959,-29.723 -45.353,-30.329 ; -45.841,-14.432 -45.841,-14.394 -45.932,-14.303 -47.952,-14.303 -48.466,-14.817 -48.466,-16.433 -48.124,-16.091 -46.39,-16.091 -46.146,-16.335 -45.776,-16.335 -45.297,-15.856 -45.297,-13.914 -45.366,-13.845 ; -45.841,-14.432 -45.366,-13.957 -45.366,-13.845 ; -45.837,19.283 -45.837,14.159 -46.029,13.966 -45.367,13.966 -44.521,13.12 -44.521,11.966 -43.842,11.287 -43.842,17.895 -41.421,20.316 -39.86,20.316 ; -45.837,19.283 -45.837,19.971 -46.029,20.164 -45.528,20.164 -44.862,20.83 -44.862,24.94 -46.488,26.566 -39.235,26.566 -38.925,26.566 -38.765,26.726 ; -45.837,19.283 -45.3,18.746 ; -45.497,35.907 -45.269,36.135 ; -45.376,-13.542 -45.366,-13.552 ; -45.376,-13.542 -45.794,-13.124 -46.022,-13.124 -46.048,-13.098 -46.048,-11.661 -46.022,-11.635 -45.376,-11.635 ; -45.376,-13.542 -45.376,-13.671 -45.366,-13.681 ; -45.376,-13.542 -45.376,-13.205 ; -45.376,-13.205 -45.376,-11.635 ; -45.376,-13.205 -45.366,-13.215 -45.366,-13.552 ; -45.366,-13.845 -45.366,-13.681 ; -45.366,-13.681 -45.366,-13.552 ; -45.353,-30.329 -44.008,-30.329 -43.973,-30.294 -43.867,-30.4 -43.867,-32.018 -45.088,-30.797 -45.088,-30.771 -44.982,-30.877 -44.805,-30.877 ; -45.353,-30.329 -44.805,-30.877 ; -45.3,18.746 -45.3,14.59 -45.224,14.514 -44.971,14.514 ; -45.3,18.746 -44.972,19.074 ; -45.269,35.337 -43.846,35.337 -43.846,37.474 -43.945,37.573 -43.945,37.459 -45.241,36.163 ; -45.269,35.337 -44.536,36.07 ; -45.269,36.135 -45.241,36.163 ; -45.269,36.135 -44.601,36.135 -44.536,36.07 ; -44.976,-18.265 -43.911,-18.265 -43.795,-18.381 -43.55,-18.381 -43.226,-18.057 -43.99,-18.057 -44.379,-17.668 ; -44.976,-18.265 -44.379,-17.668 ; -44.971,14.514 -44.341,13.884 -44.266,13.959 -44.266,18.223 -44.241,18.223 -41.44,21.024 -40.568,21.024 ; -44.971,14.514 -44.971,18.249 -44.669,18.551 ; -44.972,19.074 -42.722,21.324 -42.667,21.324 -41.899,22.092 -41.821,22.092 -41.774,22.139 v1@-41.774,22.561 ; -44.972,19.074 -44.972,18.854 -44.669,18.551 ; -44.972,19.074 -44.972,19.106 -45.25,19.384 -45.25,19.837 -44.215,20.872 ; -44.805,-30.877 -44.292,-30.877 -44.186,-30.983 -44.186,-31.496 -44.805,-30.877 ; -44.669,18.551 -42.135,21.085 -42.135,21.152 -41.744,21.543 -41.163,21.543 -41.163,21.95 ; -44.536,36.07 -44.301,35.835 -44.301,36.305 -44.536,36.07 ; -44.379,-17.668 -44.056,-17.344 ; -44.215,20.872 -44.215,24.733 -44.013,24.935 -40.784,24.935 -40.568,24.719 -40.568,21.355 ; -44.215,20.872 -43.466,21.621 -43.466,22.201 -43.623,22.358 -43.623,24.41 -43.529,24.316 -41.069,24.316 -41.163,24.222 -41.163,21.95 ; -44.056,-17.344 -43.367,-16.656 -43.367,-16.45 ; -44.056,-17.344 -43.823,-17.344 -43.718,-17.449 -43.291,-17.022 -43.291,-16.374 -43.367,-16.45 ; -43.907,5.868 -43.176,5.868 -43,5.692 ; -43.907,5.868 -43.501,6.273 ; -43.501,6.273 v1@-38.15,6.273 ; -43.501,6.273 -42.829,6.946 ; -43.386,34.753 -43.386,32.336 -42.406,31.357 -31.755,31.357 -31.588,31.19 -31.588,28.589 ; -43.367,-16.45 -43.367,-13.901 -43.298,-13.832 -43.298,-11.043 -43.298,-9.004 ; -43.298,-9.004 -43.306,-8.996 -43.306,-8.626 -42.976,-8.626 -42.937,-8.587 -42.704,-8.82 -42.704,-9.861 ; -43.298,-9.004 -43.132,-9.17 -43.132,-10.26 ; -43.132,-10.26 -43.132,-10.756 -42.574,-10.756 ; -43.132,-10.26 -43.044,-10.172 -42.86,-10.172 -42.86,-10.017 -42.704,-9.861 ; -43.066,-14.599 -43.066,-16.04 -42.867,-16.239 ; -43.066,-14.599 -43.066,-11.248 -42.861,-11.043 -42.724,-10.906 ; -43,5.692 v1@-40.844,5.692 ; -42.871,23.627 -42.871,23.486 -42.338,22.953 -42.338,22.342 -42.902,21.778 -42.949,21.778 -42.934,21.793 -42.934,22.295 -43.075,22.436 -43.075,23.799 -42.903,23.627 -42.871,23.627 ; -42.871,23.627 -42.871,23.658 -42.84,23.627 ; -42.871,23.627 -42.84,23.627 ; -42.867,-16.239 -42.187,-15.559 -42.133,-15.613 ; -42.84,23.627 v1@-41.774,22.561 ; -42.84,23.627 -41.774,23.627 v1@-41.774,22.561 ; -42.833,-34.167 -42.833,-26.125 ; -42.833,-34.167 -41.25,-35.75 ; -42.829,6.946 v1@-38.247,6.946 ; -42.829,6.946 -41.963,7.812 ; -42.724,-10.906 -42.574,-10.756 ; -42.724,-10.906 -42.554,-10.906 -42.405,-10.756 ; -42.704,-9.861 -42.704,-9.916 -42.539,-10.081 -42.402,-10.218 -42.077,-10.543 ; -42.574,-10.756 -42.405,-10.756 ; -42.133,-15.613 -42.133,-23.307 -42.097,-23.343 ; -42.133,-15.613 -42.097,-15.649 -42.097,-23.343 ; -42.097,-23.343 -42.042,-23.398 ; -42.097,-23.343 -42.097,-23.998 -42.042,-24.053 ; -42.077,-10.543 -41.974,-10.646 -41.384,-10.646 -41.612,-10.418 -41.612,-5.873 ; -42.077,-10.543 -42.077,-5.925 -42.129,-5.873 -41.612,-5.873 ; -42.042,-24.053 -42.042,-25.442 -41.7,-25.784 -39.966,-25.784 -39.624,-25.442 ; -42.042,-24.053 -42.042,-23.587 ; -42.042,-23.587 -42.042,-23.398 ; -42.042,-23.587 -41.853,-23.398 ; -42.042,-23.398 -42.042,-18.625 -41.853,-18.436 -41.853,-23.398 ; -41.963,7.812 -41.963,12.005 -41.941,12.027 -41.793,11.879 -40.783,11.879 ; -41.963,7.812 -41.424,8.351 -41.424,11.215 -41.388,11.251 -40.783,11.251 ; v1@-41.774,22.561 -41.163,21.95 ; -41.734,-3.68 -41.213,-3.68 v1@-41.192,-3.659 ; -41.734,-3.68 -41.713,-3.659 ; -41.713,-3.659 v1@-41.192,-3.659 ; -41.713,-3.659 v1@-41.171,-3.117 ; -41.612,-5.873 -41.612,-5.589 -41.612,-5.206 ; -41.612,-5.206 -39.861,-5.206 v1@-38.081,-3.426 ; -41.612,-5.206 -41.612,-4.813 ; -41.612,-4.813 -40.172,-4.813 -37.721,-2.362 -37.721,0.224 -37.889,0.392 v1@-39.459,0.392 ; VCCO-j.1@-41.584,39.356 -39.772,39.356 -39.589,39.539 ; VCCO-j.1@-41.584,39.356 -41.866,39.356 -41.964,39.258 -41.964,39.735 VCCO-j.1@-41.584,39.356 ; -41.25,-35.75 -40.626,-35.75 ; -41.25,-35.75 -40.595,-36.405 ; v1@-41.192,-3.659 v1@-40.546,-3.013 ; v1@-41.192,-3.659 v1@-40.827,-3.659 ; v1@-41.171,-3.117 v1@-41.067,-3.013 ; v1@-41.171,-3.117 -40.755,-3.117 v1@-40.651,-3.013 ; -41.163,21.95 -40.568,21.355 ; v1@-41.067,-3.013 v1@-40.651,-3.013 ; v1@-41.067,-3.013 v1@-40.733,-2.679 ; -40.937,32.779 -37.361,32.779 -37.135,32.779 ; -40.937,32.779 -41.817,32.779 -41.964,32.926 -41.964,33.806 -40.937,32.779 ; v1@-40.859,7.512 -40.525,7.512 -40.477,7.464 v1@-39.512,7.464 ; v1@-40.859,7.512 -41.654,7.512 -41.508,7.658 -41.508,7.698 -40.886,8.32 -40.886,10.528 -40.808,10.606 -40.749,10.547 -39.621,10.547 -38.532,9.458 -38.063,9.458 -37.958,9.458 -37.967,9.449 -37.967,6.987 -38.008,6.946 v1@-38.15,6.946 ; v1@-40.844,5.692 v1@-39.544,5.692 ; v1@-40.827,-4.305 -40.67,-4.305 v1@-39.407,-3.042 ; v1@-40.827,-4.305 v1@-40.827,-3.659 ; v1@-40.827,-3.659 -40.462,-3.659 v1@-39.407,-2.604 ; -40.783,11.251 -40.783,11.879 ; -40.783,11.251 -39.613,11.251 -38.468,10.106 -37.582,10.106 -37.36,9.884 -37.36,6.191 -37.442,6.273 v1@-37.574,6.273 ; -40.783,11.879 -40.142,11.879 ; v1@-40.733,-2.679 v1@-40.358,-2.304 ; v1@-40.733,-2.679 -40.317,-2.679 ; v1@-40.651,-3.013 -40.317,-2.679 ; v1@-40.651,-3.013 v1@-40.546,-3.013 ; -40.626,-35.75 -42.018,-34.358 -39.704,-34.358 -39.675,-34.387 ; -40.626,-35.75 -35.4,-35.75 VAUX-j.1@-34.95,-35.3 ; -40.595,-36.405 -33.155,-36.405 VAUX-rg.1@-32.225,-35.475 ; -40.595,-36.405 -39.979,-37.021 -32.748,-37.021 ; -40.568,21.024 -39.86,20.316 ; -40.568,21.024 -40.568,21.355 ; -40.568,21.355 -40.474,21.261 -40.458,21.261 -39.911,21.261 ; v1@-40.546,-3.013 -40.212,-2.679 -40.317,-2.679 ; v1@-40.546,-3.013 -40.066,-3.013 -39.744,-2.691 ; v1@-40.358,-2.304 v1@-40.253,-2.199 ; v1@-40.358,-2.304 v1@-39.942,-2.304 ; -40.317,-2.679 v1@-39.942,-2.304 ; v1@-40.253,-2.199 v1@-39.744,-1.69 ; v1@-40.253,-2.199 -39.879,-2.199 v1@-39.858,-2.22 ; v1@-40.252,9.956 v1@-40.236,9.956 ; v1@-40.252,9.956 -40.244,9.964 v1@-40.236,9.956 ; v1@-40.252,9.956 -40.467,9.741 -40.467,8.397 -40.292,8.222 -40.496,8.018 -39.835,8.018 -39.767,7.95 -39.512,7.95 ; v1@-40.236,9.956 -40.224,9.944 -39.796,9.944 -39.796,9.885 -39.135,9.224 -38.979,9.224 -38.483,8.728 v1@-38.483,8.609 ; -40.205,21.779 -40.205,21.626 -40.052,21.472 ; -40.205,21.779 -40.205,22.511 ; -40.205,21.779 -39.687,21.261 ; -40.205,22.511 -39.687,23.029 -39.111,23.029 -39.111,23.495 -38.37,24.236 -36.874,24.236 -36.874,26.625 -36.532,26.968 -34.524,26.968 -34.182,26.625 -34.182,24.236 -33.568,24.236 ; -40.205,22.511 -40.205,22.79 -39.926,23.07 -39.926,23.597 -40.178,23.849 -40.178,24.531 -39.749,24.96 -39.346,24.96 -39.346,24.278 -39.573,24.051 -39.573,23.749 -38.589,24.733 -37.605,24.733 -37.605,25.54 -37.327,25.818 -37.327,26.575 -36.873,27.029 -36.873,27.786 ; -40.142,11.879 -39.244,11.879 -39.182,11.817 -39.182,11.63 -38.316,10.764 -37.434,10.764 -36.962,10.292 -36.962,5.692 ; -40.052,21.472 -40.052,21.402 -39.911,21.261 ; -40.052,21.472 -39.84,21.261 ; v1@-39.942,-2.304 -39.774,-2.304 v1@-39.858,-2.22 ; v1@-39.942,-2.304 v1@-39.858,-2.22 ; -39.923,-22.671 -39.552,-23.042 -39.11,-23.042 -38.977,-22.909 -38.977,-22.565 -39.471,-22.565 -39.799,-22.237 -39.923,-22.237 ; -39.923,-22.671 -39.923,-23.409 -39.662,-23.67 ; -39.923,-22.671 -39.923,-22.237 ; -39.923,-22.237 -39.923,-18.436 -39.679,-18.192 ; -39.923,-22.237 -39.755,-22.069 ; -39.923,-14.166 -40.769,-14.166 -39.679,-15.256 -39.679,-18.192 ; -39.923,-14.166 -38.78,-14.166 ; -39.923,-14.166 -39.103,-14.986 -39.065,-14.986 ; -39.911,21.261 -39.84,21.261 ; -39.86,20.316 -39.687,20.489 -37.206,20.489 -36.469,21.226 -36.906,21.226 -39.806,21.226 -39.84,21.261 ; v1@-39.858,-2.22 v1@-39.744,-2.106 ; -39.84,21.261 -39.687,21.261 ; -39.755,-22.069 -39.679,-21.993 -39.679,-18.192 ; -39.755,-22.069 -39.074,-22.069 -39.065,-22.078 -39.065,-14.986 ; -39.744,-2.691 v1@-39.744,-2.106 ; -39.744,-2.691 v1@-39.407,-2.354 ; v1@-39.744,-2.106 -39.524,-1.886 -39.524,-1.532 v1@-39.586,-1.532 ; v1@-39.744,-2.106 v1@-39.744,-1.69 ; v1@-39.744,-1.69 v1@-39.586,-1.532 ; v1@-39.744,-1.69 -39.744,-1.532 ; -39.744,-1.532 v1@-39.586,-1.532 ; -39.744,-1.532 v1@-39.744,-0.844 ; v1@-39.744,-0.844 -39.744,-0.764 v1@-39.744,-0.239 ; v1@-39.744,-0.844 v1@-39.459,-0.844 ; v1@-39.744,-0.239 v1@-39.459,-0.239 ; v1@-39.744,-0.239 -39.744,0.297 v1@-39.649,0.392 ; -39.675,-34.387 -39.675,-34.936 -39.333,-35.278 -39.592,-35.278 ; -39.675,-34.387 -39.675,-26.75 -39.333,-26.407 -38.663,-26.407 ; -39.662,-23.67 -39.624,-23.708 -39.624,-24.148 ; -39.662,-23.67 -38.438,-23.67 ; v1@-39.649,0.392 v1@-39.459,0.392 ; v1@-39.649,0.392 -39.501,0.54 -39.459,0.498 v1@-39.459,0.392 ; -39.624,-25.442 -37.336,-25.442 -37.253,-25.359 -37.253,-24.731 ; -39.624,-25.442 -39.624,-24.95 ; -39.624,-24.95 -39.624,-24.474 ; -39.624,-24.95 -39.386,-24.712 ; -39.624,-24.474 -39.624,-24.148 ; -39.624,-24.474 -39.386,-24.712 ; -39.624,-24.148 -39.56,-24.212 -38.886,-24.212 ; -39.592,-35.278 -40.103,-34.767 -41.016,-34.767 -40.505,-35.278 -39.592,-35.278 ; -39.589,39.539 -37.352,39.539 -37.123,39.767 ; -39.589,39.539 -38.844,40.284 -38.844,41.596 -39.458,42.21 -39.227,42.441 -39.177,42.391 -36.488,42.391 -36.513,42.366 -36.513,37.033 -36.499,37.019 -36.499,35.127 -36.86,34.767 ; v1@-39.586,-1.532 -39.586,-1.49 v1@-39.459,-1.363 ; v1@-39.544,5.692 -36.962,5.692 ; v1@-39.512,7.464 -38.765,7.464 ; v1@-39.512,7.464 -39.512,7.95 ; -39.512,7.95 -39.251,7.95 ; -39.512,7.95 v1@-39.512,8.211 ; v1@-39.512,8.211 -39.512,8.609 v1@-39.161,8.609 ; v1@-39.512,8.211 -39.572,8.271 -39.738,8.271 -40.098,8.631 -40.098,9.37 -40.056,9.328 -39.962,9.234 -39.767,9.234 -39.767,9.078 -39.349,8.66 -39.212,8.66 v1@-39.161,8.609 ; v1@-39.512,8.211 -39.251,7.95 ; v1@-39.459,-1.363 v1@-38.94,-0.844 ; v1@-39.459,-1.363 v1@-39.459,-0.844 ; v1@-39.459,-1.363 -39.459,-2.052 v1(-39.407,-2.103) v1@-39.407,-2.354 ; v1@-39.459,-0.844 v1@-38.94,-0.844 ; v1@-39.459,-0.844 v1@-39.459,-0.239 ; v1@-39.459,-0.239 -38.502,-0.239 v1@-38.419,-0.322 ; v1@-39.459,-0.239 v1@-39.459,0.392 ; v1@-39.407,-3.042 -38.377,-2.012 -38.377,-1.324 ; v1@-39.407,-3.042 v1@-39.407,-2.604 ; v1@-39.407,-2.604 v1@-39.407,-2.354 ; v1@-39.407,-2.604 -39.336,-2.533 v1@-39.336,-2.283 ; v1@-39.407,-2.354 v1@-39.336,-2.283 ; -39.386,-24.712 -39.11,-24.988 -38.951,-24.829 -37.934,-24.829 ; -39.386,-24.712 -38.886,-24.212 ; v1@-39.336,-2.283 -38.377,-1.324 ; v1@-39.336,-2.283 -39.336,-1.865 -38.565,-1.094 -38.815,-0.844 v1@-38.94,-0.844 ; -39.251,7.95 -38.765,7.464 ; -39.251,7.95 -39.174,7.95 -39.037,8.087 -39.037,8.485 v1@-39.161,8.609 ; v1@-39.161,8.609 v1@-38.483,8.609 ; -39.09,-5.507 -39.18,-5.417 -39.18,-5.381 v1@-38.081,-4.282 ; -39.09,-5.507 -38.78,-5.507 -38.438,-5.849 -38.438,-6.107 ; -39.065,-14.986 -39.065,-14.451 -38.78,-14.166 ; v1@-38.94,-0.844 v1@-38.419,-0.322 ; -38.886,-24.212 -38.455,-24.212 ; -38.78,-14.166 -38.438,-13.824 ; -38.765,7.464 v1@-38.247,6.946 ; -38.765,7.464 -38.716,7.464 -38.648,7.532 -38.483,7.532 v1@-38.483,8.609 ; -38.765,26.07 -39.244,25.591 -39.32,25.591 -38.941,25.212 -38.034,25.212 -37.958,25.288 -38.336,25.666 -38.336,25.893 -38.084,25.893 -37.983,25.994 -37.983,26.499 -38.235,26.751 -38.235,27.003 -38.108,27.13 -37.428,27.13 -37.378,27.18 -37.378,27.786 ; -38.765,26.07 -38.765,26.726 ; -38.765,26.726 -38.765,27.786 -38.488,28.063 -38.211,27.786 -37.378,27.786 ; -38.663,-26.407 -39.292,-25.778 -37.091,-25.778 -36.887,-25.982 -36.887,-26.591 ; -38.663,-26.407 -37.071,-26.407 -36.887,-26.591 ; -38.455,-24.212 -38.438,-24.195 -38.438,-23.67 ; -38.455,-24.212 -37.898,-24.212 ; -38.438,-23.67 -38.438,-13.824 ; -38.438,-13.824 -38.438,-7.221 ; -38.438,-7.221 -37.898,-7.221 ; -38.438,-7.221 -38.438,-6.208 -38.438,-6.107 ; -38.438,-6.107 -38.216,-5.885 -38.216,-5.169 -37.642,-4.595 -37.351,-4.595 -37.306,-4.55 -37.306,-5.17 -37.376,-5.24 -37.376,-5.258 -37.836,-5.718 -37.646,-5.908 ; v1@-38.419,-0.322 -37.981,0.115 -37.981,-0.928 v1@-38.158,-1.105 ; v1@-38.419,-0.322 -38.189,-0.552 -38.377,-0.74 -38.377,-1.324 ; -38.377,-1.324 v1@-38.158,-1.105 ; v1@-38.247,6.946 v1@-38.15,6.946 ; v1@-38.247,6.946 v1@-38.15,6.849 ; v1@-38.199,1.03 -37.251,1.03 -37.251,0.519 ; v1@-38.15,6.273 v1@-37.574,6.273 ; v1@-38.15,6.273 v1@-38.15,6.849 ; v1@-38.15,6.849 v1@-37.574,6.273 ; v1@-38.15,6.849 v1@-38.15,6.946 ; v1@-38.081,-4.282 v1@-38.081,-3.426 ; v1@-38.081,-4.282 -37.774,-3.975 -37.685,-4.064 -37.35,-4.064 -37.35,-2.695 ; v1@-38.081,-3.426 -37.35,-2.695 ; -37.934,-24.829 -37.351,-24.829 -37.253,-24.731 ; -37.934,-24.829 -37.898,-24.793 -37.898,-24.212 ; -37.898,-24.212 -37.898,-7.221 ; -37.898,-24.212 -37.253,-24.212 ; -37.898,-7.221 -37.314,-7.221 -37.288,-7.195 ; -37.832,28.589 -37.378,28.135 -37.378,27.786 ; -37.832,28.589 -31.588,28.589 ; -37.646,-5.908 -37.518,-5.78 -37.288,-5.78 -37.314,-5.806 -37.314,-6.054 -37.5,-6.054 -37.646,-5.908 ; -37.646,-5.908 -37.957,-6.219 -38.305,-6.567 -38.429,-6.567 -38.252,-6.744 -37.429,-6.744 -37.296,-6.611 -37.244,-6.611 -37.288,-6.655 -37.288,-7.195 ; -37.589,40.233 -38.033,40.677 -38.033,41.386 -37.87,41.549 -37.782,41.461 -37.589,41.461 -37.589,40.233 ; -37.589,40.233 -37.123,39.767 ; -37.589,40.233 -37.589,40.1 -37.648,40.041 -37.685,40.078 -38.602,40.078 -38.432,40.248 -38.432,42.052 -37.323,42.052 -37.064,41.793 -37.064,39.827 -37.123,39.767 ; -37.378,27.786 -36.873,27.786 ; -37.35,-2.695 -37.35,0.42 -37.251,0.519 ; -37.35,-2.695 -37.251,-2.596 -37.251,0.519 ; -37.288,-7.195 -37.253,-7.23 -37.253,-24.212 ; -37.253,-24.731 -37.253,-24.212 ; -37.253,-24.212 -36.763,-24.212 ; -37.251,0.519 -36.828,0.942 ; -37.212,1.65 -37.212,3.272 -37.212,5.191 -37.259,5.144 -37.259,1.65 -37.212,1.65 ; -37.212,1.65 -36.998,1.65 -36.805,1.457 -36.805,5.849 -36.962,5.692 ; -37.212,1.65 -37.212,1.326 -36.828,0.942 ; -37.148,33.299 -36.99,33.299 -36.784,33.505 -36.784,34.691 -36.86,34.767 ; -37.148,33.299 -37.212,33.299 -37.212,33.427 -37.148,33.363 -37.148,33.299 ; -37.148,33.299 -37.148,32.792 -37.135,32.779 ; -37.123,39.767 -37.123,35.164 -37.19,35.097 -36.86,34.767 ; -36.887,-26.591 -36.763,-26.715 -36.763,-24.212 ; -36.873,27.786 -36.672,27.987 -32.205,27.987 -32.164,27.946 -32.164,23.445 ; -36.873,27.786 -36.595,27.508 -33.593,27.508 -33.568,27.483 -33.568,24.236 ; -36.828,0.942 -36.784,0.986 -36.763,0.965 -36.763,0.877 ; -36.828,0.942 -36.763,0.877 ; -36.763,-24.212 -36.763,-2.823 -36.757,-2.817 -36.757,-1.669 -36.763,-1.663 -36.763,0.877 ; -36.729,-34.582 -36.729,-34.647 -36.584,-34.791 ; -36.729,-34.582 -36.21,-34.063 -36.137,-34.063 ; -36.729,-34.582 -36.729,-33.472 -36.137,-34.063 ; -36.729,-27.816 -36.729,-27.097 -36.64,-27.185 ; -36.729,-27.816 -36.64,-27.905 ; -36.64,-27.905 -36.64,-29.42 -35.791,-28.571 -35.255,-28.571 ; -36.64,-27.905 -36.64,-27.185 ; -36.64,-27.905 -36.117,-28.428 -35.398,-28.428 ; -36.64,-27.185 -35.982,-27.844 ; -36.584,-34.791 -36.076,-35.3 VAUX-j.1@-34.95,-35.3 ; -36.584,-34.791 -36.137,-34.344 VAUX-j.1@-35.856,-34.344 ; -36.137,-34.063 VAUX-j.1@-35.856,-34.344 ; -35.982,-27.844 -35.398,-28.428 ; -35.982,-27.844 -34.876,-27.844 -34.592,-27.56 -33.726,-27.56 -33.442,-27.844 -32.336,-27.844 -31.555,-27.063 -31.555,-25.957 -31.713,-25.799 -31.713,-24.681 -30.036,-24.681 -28.013,-26.704 -16.81,-26.704 -21.053,-30.947 -21.053,-31.191